# EAGLE board pcb_business_card (EAGLE 9.6.2)
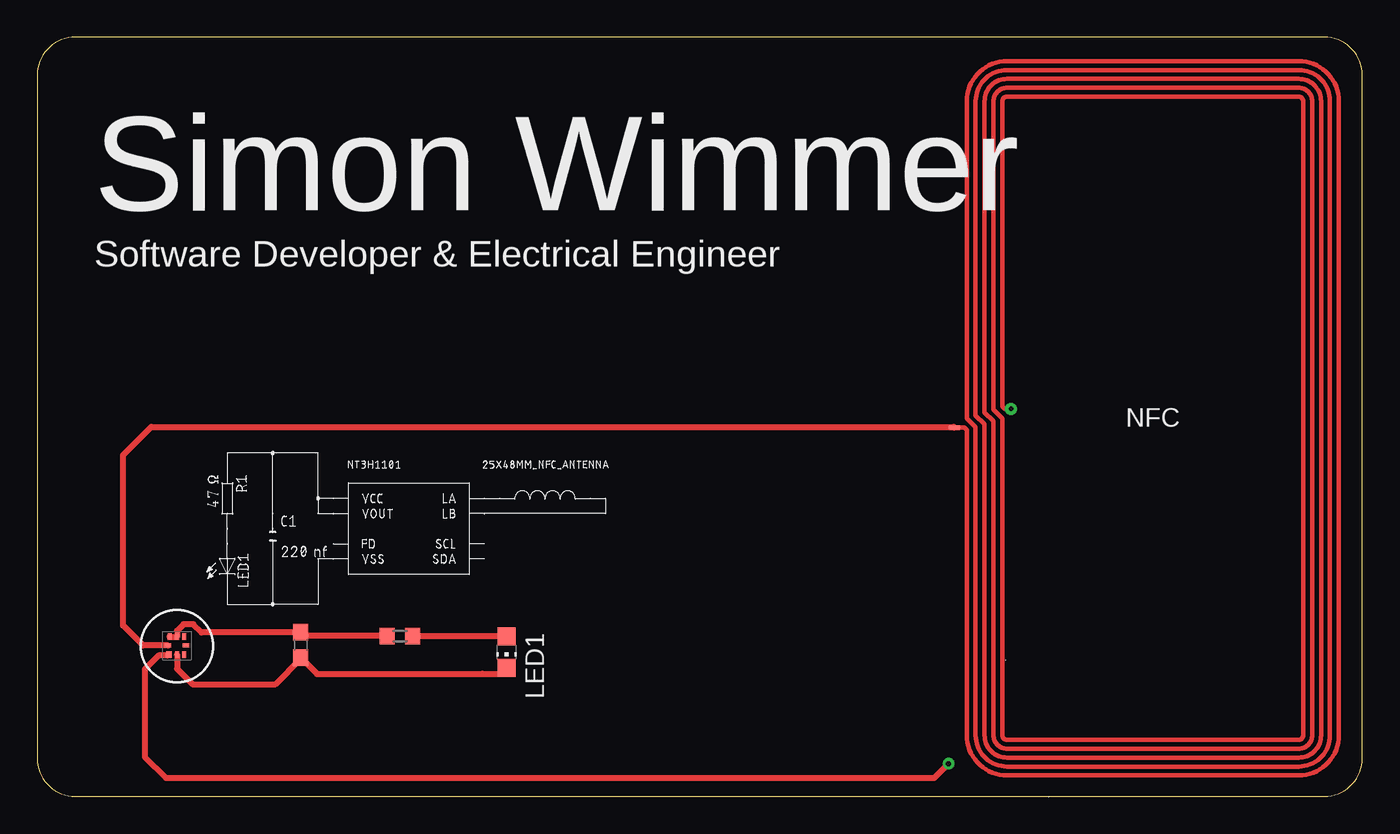
[diagram p0: board, top side]
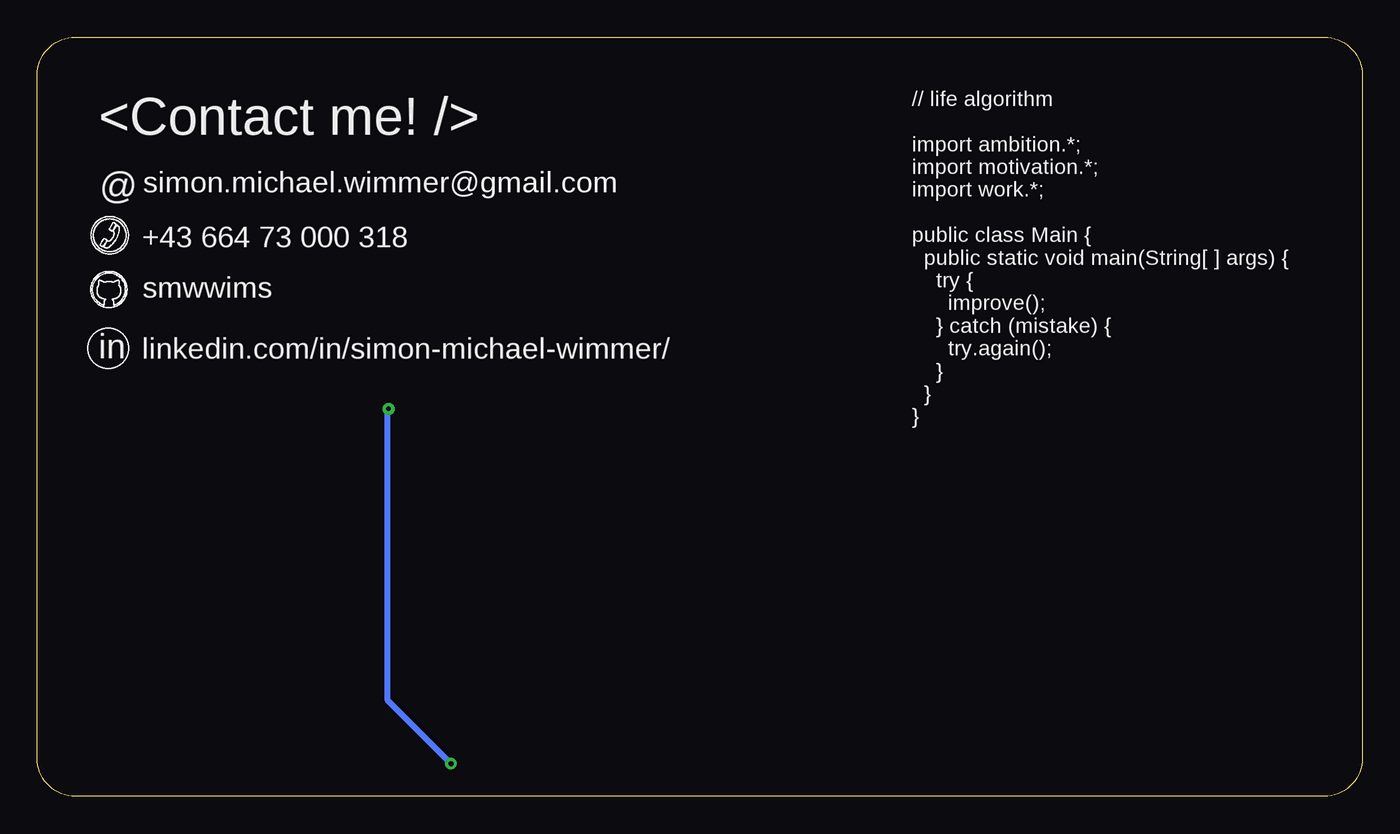
[diagram p1: board, bottom side, seen from below]

Size 89 x 51 mm. Coordinates in mm from the lower left corner, seen from the top.
Outline: 86.46,51 2.54,51 arc90 0,48.46 0,2.54 arc90 2.54,0 86.46,0 arc90 89,2.54 89,48.46 arc90 86.46,51
Copper layers (1*16): Top 0.035mm / dielectric 1.5mm / Bottom 0.035mm
Design rules "default": minimum track width 6mil, minimum drill 0.35mm, track to track 6mil, track to pad 6mil, pad to pad 6mil, via to via 6mil, smd to smd 6mil, copper to edge 40mil, drill to drill 6mil, minimum pad ring 10mil, minimum via ring 8mil, stop-mask expansion 4mil, vias tented up to drill 0mil, thermal gap 10mil

## Footprints (pad centres in the part's own frame; a part is rotated, then mirrored left to right if it is on the bottom)
25X48MM_NFC = smd 0.3 x 0.75: P$1 -0.635,13.335 | drill 0.3: P$2 0.635,9.525
C0603 = smd 1.1 x 1: 1 -0.85,0; 2 0.85,0
CHIP-LED0805 = smd 1.2 x 1.2: A 0,-1.05; C 0,1.05
XQFN8 = smd 0.27 x 0.45: FD 0,-0.6; LB 0,0.6 | smd 0.45 x 0.37: LA -0.6,0.55 | smd 0.45 x 0.27: SCL -0.6,-0.5; SDA 0.6,-0.5; VCC 0.6,0; VOUT 0.6,0.5; VSS -0.6,0
R0603 = smd 1 x 1.1: 1 -0.85,0; 2 0.85,0

## Placement (x,y rotation side)
ANT  25X48MM_NFC_ANTENNA  [25X48MM_NFC]  74.93,25.4 90 top
C1  220 nf  [C0603]  17.7,10.17 270 top
LED1  [CHIP-LED0805]  31.52,9.69 180 top
NT3H1101  NT3H  [XQFN8]  9.39,10.13 90 top
R1  47 Ω  [R0603]  24.36,10.77 0 top

## Library data of the parts
ANT NT3H1101 = PCB_BusinessCard
C1 R1 = resistor
LED1 = led

## Nets
N$1: ANT.P$2 NT3H1101.LA
N$2: ANT.P$1 NT3H1101.LB
N$3: C1.1 NT3H1101.VCC NT3H1101.VOUT R1.1
N$4: LED1.A R1.2
N$6: C1.2 LED1.C NT3H1101.VSS

## Tracks (layer width: path | path; a pad name or v marks a point on that pad's centre or on a via)
N$1  (via drill 0.35)
  Top 0.406: NT3H1101.LA 8.76,9.46 8.15,9.46 7.23,8.54 7.23,2.63 8.63,1.23 60.25,1.23 v61.21,2.19
  Bottom 0.406: v61.21,2.19 65.45,6.43 65.45,25.99 ANT.P$2
N$2
  Top 0.406: NT3H1101.LB 7.11,10.13 5.77,11.47 5.77,22.92 7.66,24.82 61.54,24.82 ANT.P$1
N$3
  Top 0.406: NT3H1101.VOUT NT3H1101.VCC 9.39,11.13 9.82,11.56 10.48,11.56 11.03,11.01 11.04,11.02 C1.1 17.96,10.77 R1.1
N$4
  Top 0.406: R1.2 31.5,10.77 LED1.A
N$6
  Top 0.406: NT3H1101.VSS 9.39,8.57 10.41,7.56 10.41,7.53 16,7.53 17.7,9.23 C1.2 18.8,8.23 29.88,8.24 31.13,8.24 LED1.C

## Text on the board
tNames: Simon Wimmer | Software Developer & Electrical Engineer | NFC
bNames: <Contact me! /> | simon.michael.wimmer@gmail.com | @ | +43 664 73 000 318 | smwwims | linkedin.com/in/simon-michael-wimmer/ | in | // life algorithm / / import ambition.*; / import motivation.*; / import work.*; / / public class Main { / public static void main(String[ ] args) { / try { / improve(); / } catch (mistake) { / try.again(); / } / } / }